# EAGLE board phoney text (EAGLE 9.6.2)
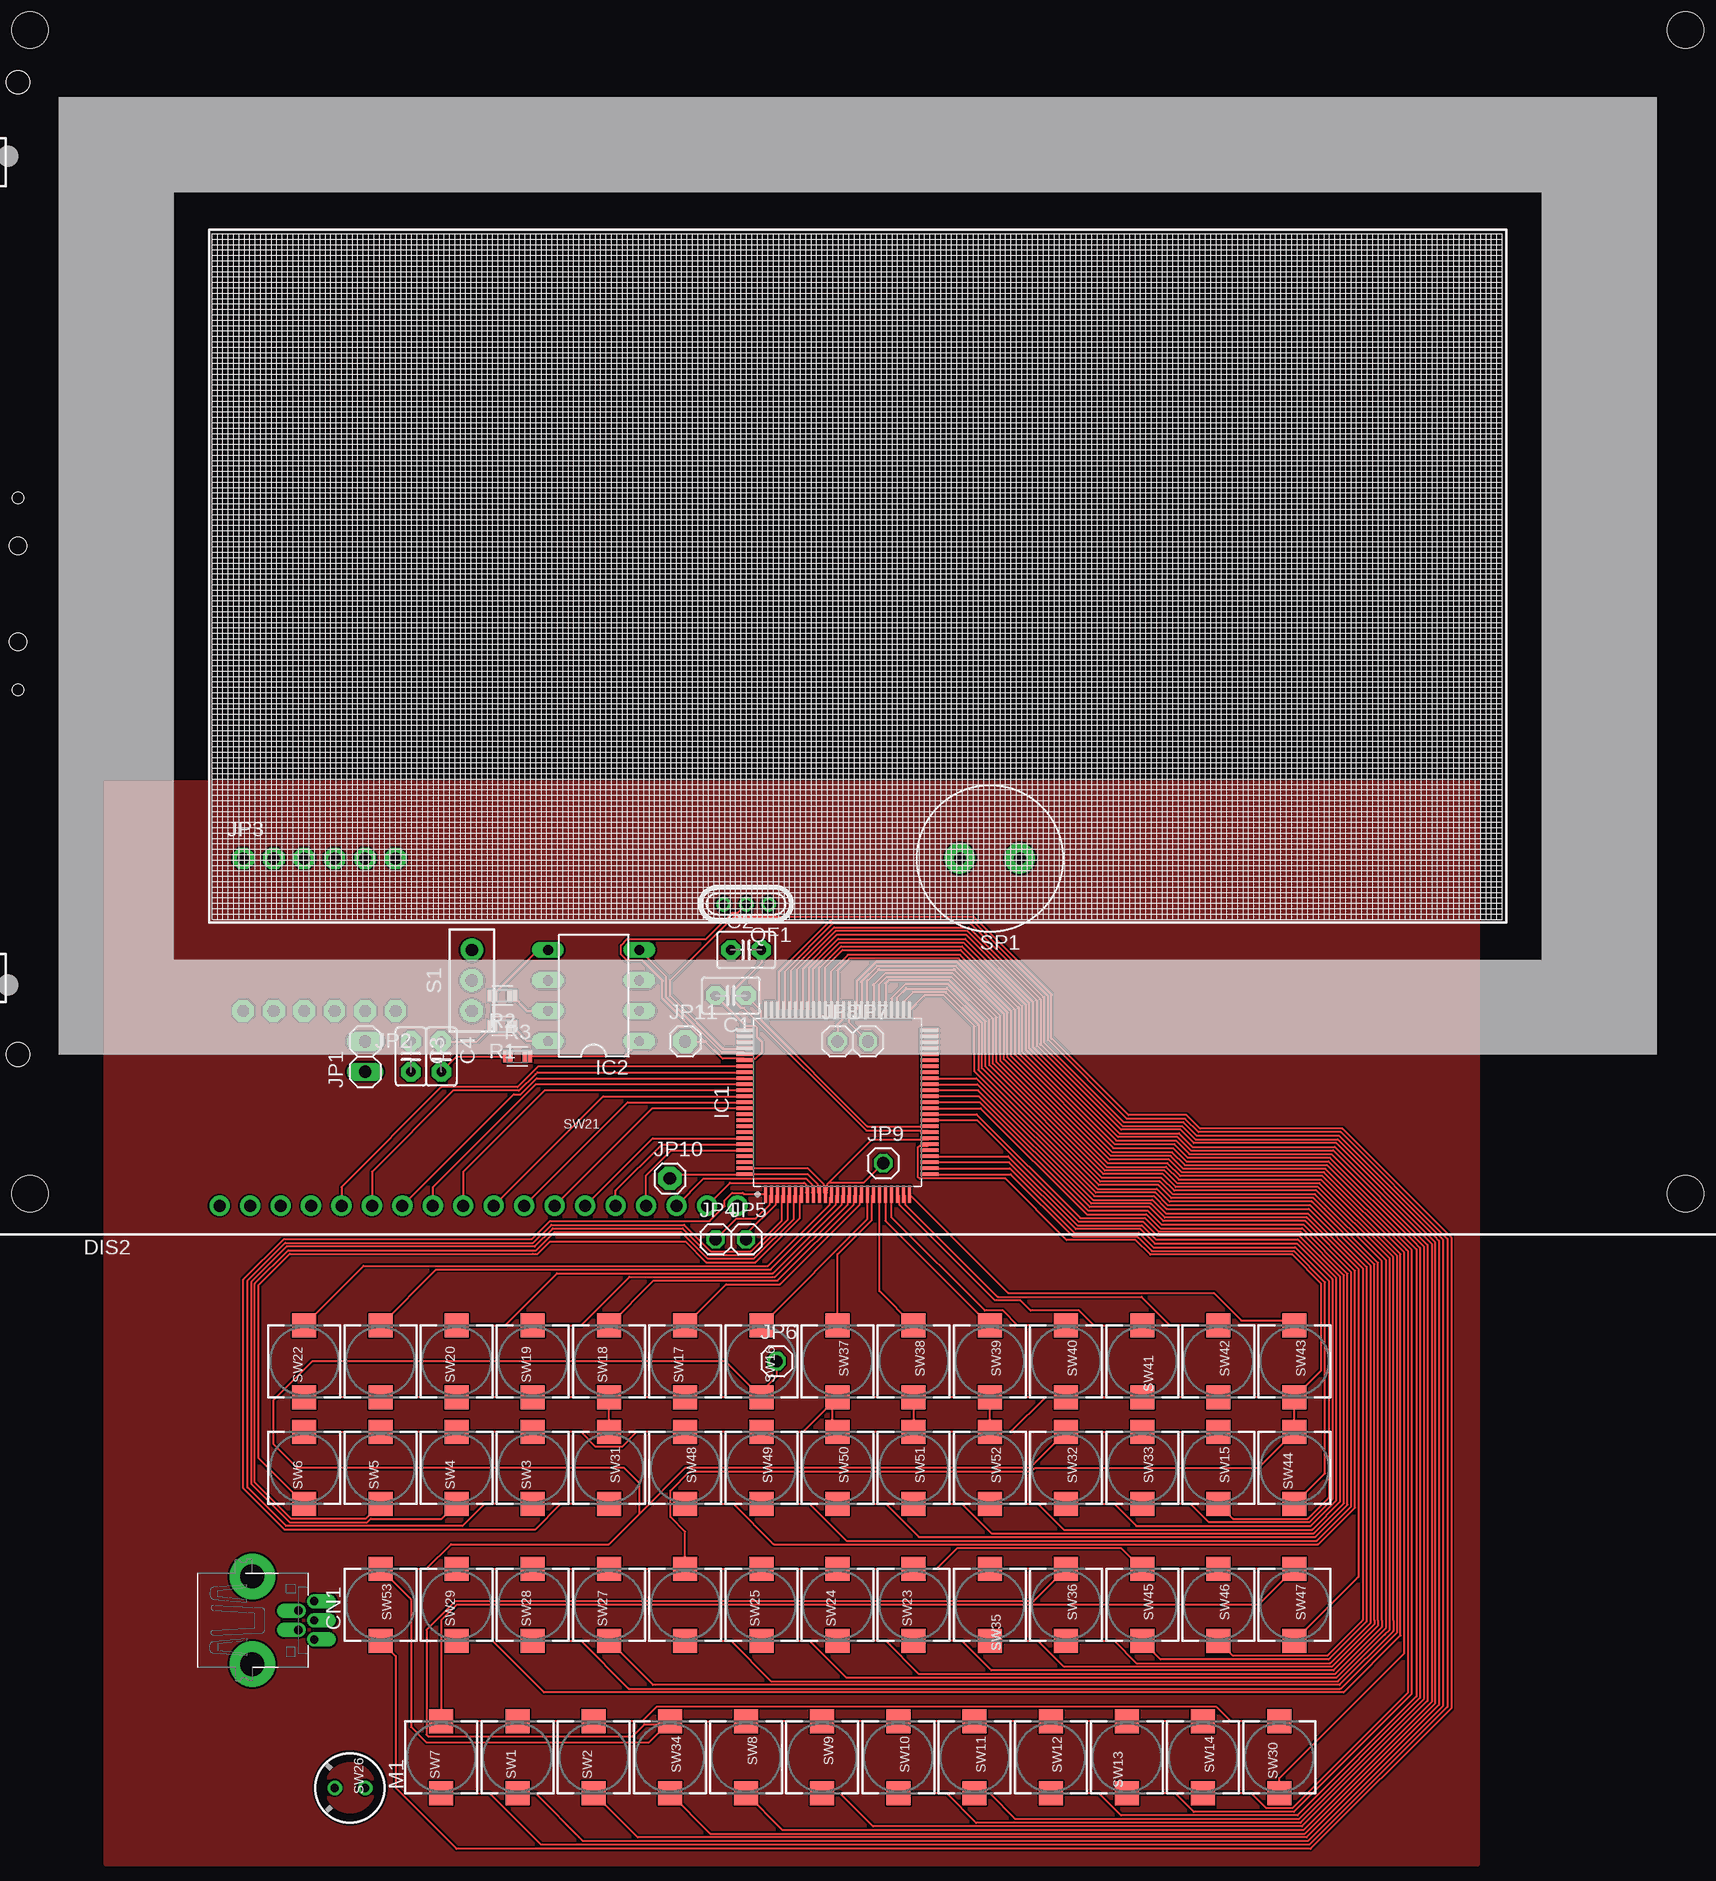
[diagram p0: board, top side]
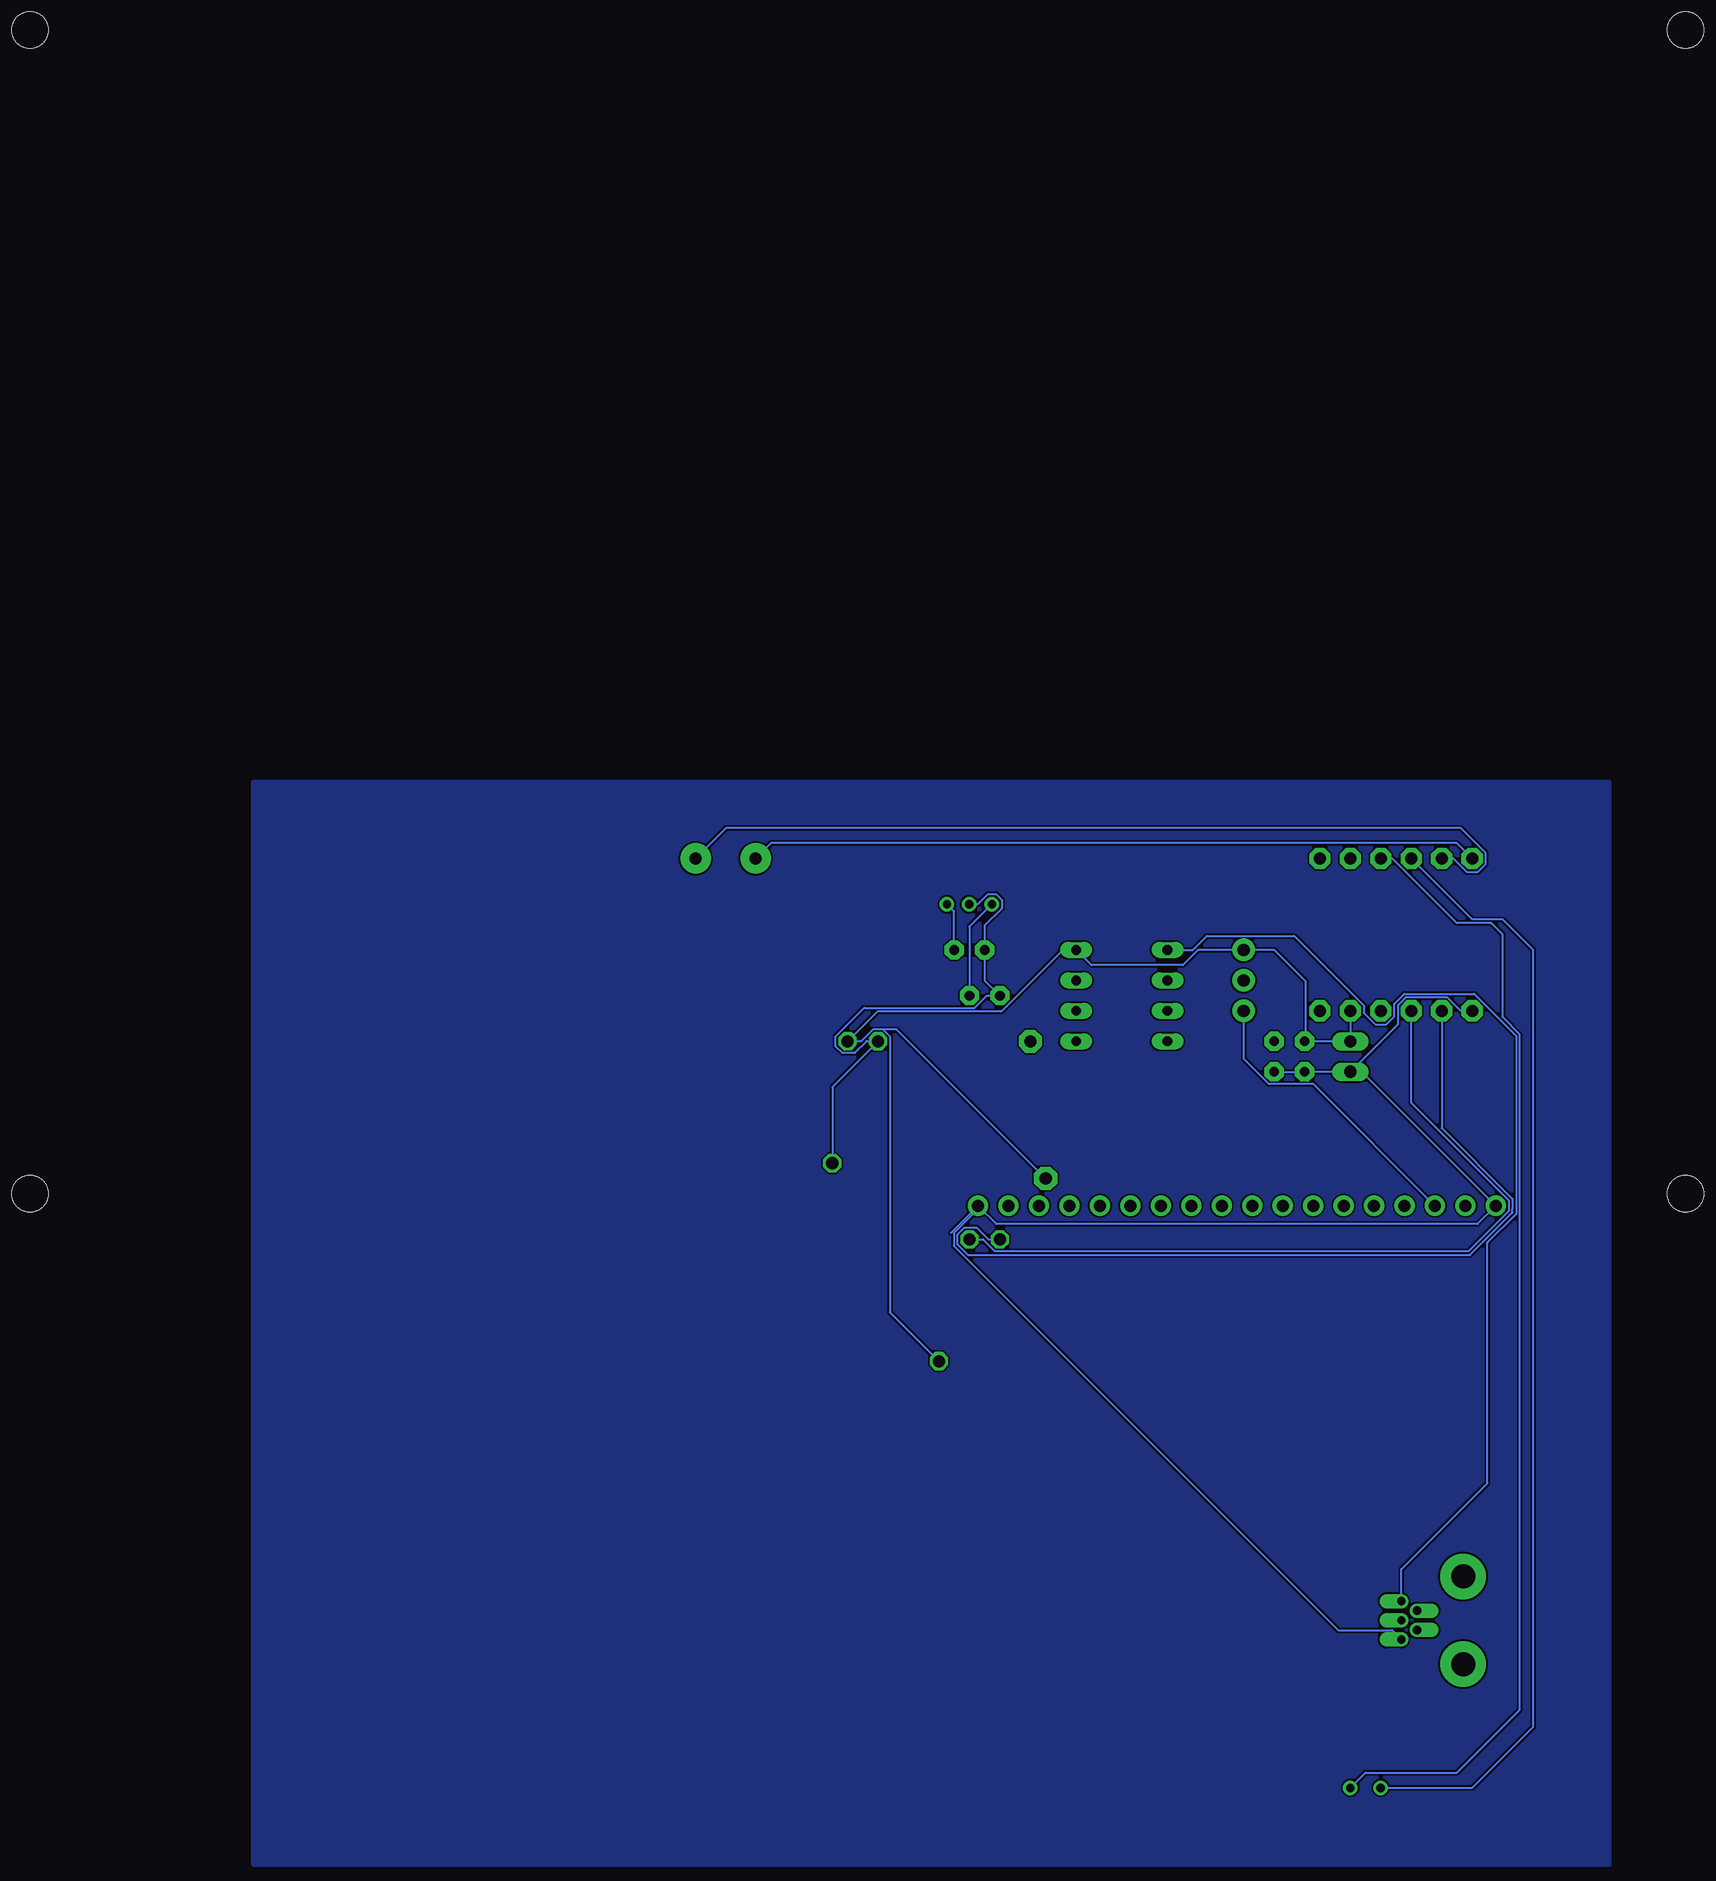
[diagram p1: board, bottom side, seen from below]

No outline drawn. Coordinates in mm, seen from the top.
Copper layers (1*16): Top 0.035mm / dielectric 1.5mm / Bottom 0.035mm
Design rules "default": minimum track width 6mil, minimum drill 0.35mm, track to track 6mil, track to pad 6mil, pad to pad 6mil, via to via 6mil, smd to smd 6mil, copper to edge 40mil, drill to drill 6mil, minimum pad ring 10mil, minimum via ring 8mil, stop-mask expansion 4mil, vias tented up to drill 0mil, thermal gap 10mil

## Footprints (pad centres in the part's own frame; a part is rotated, then mirrored left to right if it is on the bottom)
C2.5-3 = drill 0.813 pad 1.6 octagon: 1 -1.27,0; 2 1.27,0
C2.5-2 = drill 0.813 pad 1.6 octagon: 1 -1.27,0; 2 1.27,0
USB-MINIB-THM-MOLEX = drill 0.7 offset: D+ 0,9.72; D- -0.8,8.42; GND 1.6,9.72; ID 0.8,8.42; VBUS -1.6,9.72 | drill 2 pad 3.81: GND1 -3.65,4.57; GND4 3.65,4.57
MGLS2401280TZ = drill 1 pad 1.676: 1 15.8,-1; 2 18.34,-1; 3 20.88,-1; 4 23.42,-1; 5 25.96,-1; 6 28.5,-1; 7 31.04,-1; 8 33.58,-1; 9 36.12,-1; 10 38.66,-1; 11 41.2,-1; 12 43.74,-1; 13 46.28,-1; 14 48.82,-1; 15 51.36,-1; 16 53.9,-1; 17 56.44,-1; 18 58.98,-1 | hole 3: 0,0; 138,0; 0,97; 138,97
QFP50P1600X1600X160-100N = smd 1.469 x 0.28: 1 -7.671,6; 2 -7.671,5.5; 3 -7.671,5; 4 -7.671,4.5; 5 -7.671,4; 6 -7.671,3.5; 7 -7.671,3; 8 -7.671,2.5; 9 -7.671,2; 10 -7.671,1.5; 11 -7.671,1; 12 -7.671,0.5; 13 -7.671,0; 14 -7.671,-0.5; 15 -7.671,-1; 16 -7.671,-1.5; 17 -7.671,-2; 18 -7.671,-2.5; 19 -7.671,-3; 20 -7.671,-3.5; 21 -7.671,-4; 22 -7.671,-4.5; 23 -7.671,-5; 24 -7.671,-5.5; 25 -7.671,-6; 51 7.671,-6; 52 7.671,-5.5; 53 7.671,-5; 54 7.671,-4.5; 55 7.671,-4; 56 7.671,-3.5; 57 7.671,-3; 58 7.671,-2.5; 59 7.671,-2; 60 7.671,-1.5; 61 7.671,-1; 62 7.671,-0.5; 63 7.671,0; 64 7.671,0.5; 65 7.671,1; 66 7.671,1.5; 67 7.671,2; 68 7.671,2.5; 69 7.671,3; 70 7.671,3.5; 71 7.671,4; 72 7.671,4.5; 73 7.671,5; 74 7.671,5.5; 75 7.671,6 | smd 0.28 x 1.469: 26 -6,-7.671; 27 -5.5,-7.671; 28 -5,-7.671; 29 -4.5,-7.671; 30 -4,-7.671; 31 -3.5,-7.671; 32 -3,-7.671; 33 -2.5,-7.671; 34 -2,-7.671; 35 -1.5,-7.671; 36 -1,-7.671; 37 -0.5,-7.671; 38 0,-7.671; 39 0.5,-7.671; 40 1,-7.671; 41 1.5,-7.671; 42 2,-7.671; 43 2.5,-7.671; 44 3,-7.671; 45 3.5,-7.671; 46 4,-7.671; 47 4.5,-7.671; 48 5,-7.671; 49 5.5,-7.671; 50 6,-7.671; 76 6,7.671; 77 5.5,7.671; 78 5,7.671; 79 4.5,7.671; 80 4,7.671; 81 3.5,7.671; 82 3,7.671; 83 2.5,7.671; 84 2,7.671; 85 1.5,7.671; 86 1,7.671; 87 0.5,7.671; 88 0,7.671; 89 -0.5,7.671; 90 -1,7.671; 91 -1.5,7.671; 92 -2,7.671; 93 -2.5,7.671; 94 -3,7.671; 95 -3.5,7.671; 96 -4,7.671; 97 -4.5,7.671; 98 -5,7.671; 99 -5.5,7.671; 100 -6,7.671
DIL08 = drill 0.813 long: 1 -3.81,-3.81; 2 -1.27,-3.81; 3 1.27,-3.81; 4 3.81,-3.81; 5 3.81,3.81; 6 1.27,3.81; 7 -1.27,3.81; 8 -3.81,3.81
1X02 = drill 1.016 long: 1 -1.27,0; 2 1.27,0
1X06-CLEANBIG = drill 1.016 pad 1.778 octagon: 1 -6.35,0; 2 -3.81,0; 3 -1.27,0; 4 1.27,0; 5 3.81,0; 6 6.35,0
1X01 = drill 1.016 octagon: 1 0,0
1X01' = drill 1.016 pad 1.93 octagon: 1 0,0
F6050AP = drill 0.7 pad 1.2: 1 0,1.27; 2 0,-1.27
UM1 = drill 0.7 pad 1.2: 1 -1.875,0; 2 -0.027,0; 3 1.875,0
RESC1608X60 = smd 0.799 x 0.974: 1 -0.815,0; 2 0.815,0
SWITCH-SPDT-PTH-8.5X3.7MM = drill 1.016 pad 1.88: 1 -2.54,0; 2 0,0; 3 2.54,0
PS12 = drill 1 pad 2.54: P$1 -2.5,0; P$2 2.5,0
PUSHBUTTON_SMD_SJ = smd 2 x 2: P$1 3,0; P$2 -3,0

## Placement (x,y rotation side)
C1  [C2.5-3]  44.45,74.93 180 top
C2  [C2.5-3]  45.72,78.74 0 top
C3  [C2.5-2]  17.78,69.85 270 top
C4  [C2.5-2]  20.32,69.85 270 top
CN1  [USB-MINIB-THM-MOLEX]  0,22.86 270 top
DIS2  MGLS2401280TZ  [MGLS2401280TZ]  -13.97,58.42 0 top
IC1  ATMEGA2560  [QFP50P1600X1600X160-100N]  53.34,66.04 90 top
IC2  [DIL08]  33.02,74.93 90 top
JP1  [1X02]  13.97,69.85 90 top
JP2  [1X06-CLEANBIG]  10.16,73.66 180 top
JP3  [1X06-CLEANBIG]  10.16,86.36 0 top
JP4  [1X01]  43.18,54.61 0 top
JP5  [1X01]  45.72,54.61 0 top
JP6  [1X01]  48.26,44.45 0 top
JP7  [1X01]  55.88,71.12 0 top
JP8  [1X01]  53.34,71.12 0 top
JP9  [1X01]  57.15,60.96 0 top
JP10  [1X01']  39.37,59.69 0 top
JP11  [1X01']  40.64,71.12 0 top
M1  ELECTRET_MICROPHON-F6050AP  [F6050AP]  12.7,8.89 270 top
QF1  16M20AUM1  [UM1]  45.72,82.55 180 top
R1  [RESC1608X60]  25.4,72.39 180 top
R2  [RESC1608X60]  25.4,74.93 180 top
R3  [RESC1608X60]  26.67,69.85 0 top
S1  TOGGLE  [SWITCH-SPDT-PTH-8.5X3.7MM]  22.86,76.2 90 top
SP1  SPEAKER/PS12  [PS12]  66.04,86.36 180 top
SW1  [PUSHBUTTON_SMD_SJ]  26.67,11.43 90 top
SW2  [PUSHBUTTON_SMD_SJ]  33.02,11.43 90 top
SW3  [PUSHBUTTON_SMD_SJ]  27.94,35.56 90 top
SW4  [PUSHBUTTON_SMD_SJ]  21.59,35.56 90 top
SW5  [PUSHBUTTON_SMD_SJ]  15.24,35.56 90 top
SW6  [PUSHBUTTON_SMD_SJ]  8.89,35.56 90 top
SW7  [PUSHBUTTON_SMD_SJ]  20.32,11.43 90 top
SW8  [PUSHBUTTON_SMD_SJ]  45.72,11.43 270 top
SW9  [PUSHBUTTON_SMD_SJ]  52.07,11.43 270 top
SW10  [PUSHBUTTON_SMD_SJ]  58.42,11.43 270 top
SW11  [PUSHBUTTON_SMD_SJ]  64.77,11.43 270 top
SW12  [PUSHBUTTON_SMD_SJ]  71.12,11.43 270 top
SW13  [PUSHBUTTON_SMD_SJ]  77.47,11.43 270 top
SW14  [PUSHBUTTON_SMD_SJ]  83.82,11.43 270 top
SW15  [PUSHBUTTON_SMD_SJ]  85.09,35.56 270 top
SW16  [PUSHBUTTON_SMD_SJ]  46.99,44.45 90 top
SW17  [PUSHBUTTON_SMD_SJ]  40.64,44.45 90 top
SW18  [PUSHBUTTON_SMD_SJ]  34.29,44.45 90 top
SW19  [PUSHBUTTON_SMD_SJ]  27.94,44.45 90 top
SW20  [PUSHBUTTON_SMD_SJ]  21.59,44.45 90 top
SW21  [PUSHBUTTON_SMD_SJ]  15.24,44.45 90 top
SW22  [PUSHBUTTON_SMD_SJ]  8.89,44.45 90 top
SW23  [PUSHBUTTON_SMD_SJ]  59.69,24.13 90 top
SW24  [PUSHBUTTON_SMD_SJ]  53.34,24.13 90 top
SW25  [PUSHBUTTON_SMD_SJ]  46.99,24.13 90 top
SW26  [PUSHBUTTON_SMD_SJ]  40.64,24.13 90 top
SW27  [PUSHBUTTON_SMD_SJ]  34.29,24.13 90 top
SW28  [PUSHBUTTON_SMD_SJ]  27.94,24.13 90 top
SW29  [PUSHBUTTON_SMD_SJ]  21.59,24.13 90 top
SW30  [PUSHBUTTON_SMD_SJ]  90.17,11.43 90 top
SW31  [PUSHBUTTON_SMD_SJ]  34.29,35.56 270 top
SW32  [PUSHBUTTON_SMD_SJ]  72.39,35.56 270 top
SW33  [PUSHBUTTON_SMD_SJ]  78.74,35.56 270 top
SW34  [PUSHBUTTON_SMD_SJ]  39.37,11.43 270 top
SW35  [PUSHBUTTON_SMD_SJ]  66.04,24.13 270 top
SW36  [PUSHBUTTON_SMD_SJ]  72.39,24.13 270 top
SW37  [PUSHBUTTON_SMD_SJ]  53.34,44.45 270 top
SW38  [PUSHBUTTON_SMD_SJ]  59.69,44.45 270 top
SW39  [PUSHBUTTON_SMD_SJ]  66.04,44.45 270 top
SW40  [PUSHBUTTON_SMD_SJ]  72.39,44.45 270 top
SW41  [PUSHBUTTON_SMD_SJ]  78.74,44.45 270 top
SW42  [PUSHBUTTON_SMD_SJ]  85.09,44.45 270 top
SW43  [PUSHBUTTON_SMD_SJ]  91.44,44.45 270 top
SW44  [PUSHBUTTON_SMD_SJ]  91.44,35.56 90 top
SW45  [PUSHBUTTON_SMD_SJ]  78.74,24.13 270 top
SW46  [PUSHBUTTON_SMD_SJ]  85.09,24.13 270 top
SW47  [PUSHBUTTON_SMD_SJ]  91.44,24.13 270 top
SW48  [PUSHBUTTON_SMD_SJ]  40.64,35.56 270 top
SW49  [PUSHBUTTON_SMD_SJ]  46.99,35.56 270 top
SW50  [PUSHBUTTON_SMD_SJ]  53.34,35.56 270 top
SW51  [PUSHBUTTON_SMD_SJ]  59.69,35.56 270 top
SW52  [PUSHBUTTON_SMD_SJ]  66.04,35.56 270 top
SW53  [PUSHBUTTON_SMD_SJ]  15.24,24.13 270 top

## Library data of the parts
C1-C4 = capacitor-wima
CN1 JP2 JP3 JP10 JP11 SP1 SW1-SW53 = adafruit
DIS2 = display-lcd; OC_FARNELL: 1183196; OC_NEWARK: unknown
IC1 = IC_Embedded; CATEGORY: IC_Embedded; DESCRIPTION: IC MCU 8BIT 256KB FLASH 100TQFP; MANUFACTURER: Microchip Technology; MPN: ATMEGA2560-16AUR; OPERATING_TEMP: -40°C to 85°C; PART_STATUS: Active; SERIES: AVR® ATmega; SPEED: 16MHz; SUB-CATEGORY: Microcontroller
IC2 = ic-package
JP1 JP4-JP9 = pinhead
M1 = microphon
QF1 = crystal; OC_FARNELL: unknown; OC_NEWARK: unknown
R1-R3 = Resistor; CATEGORY: Resistor; SUB-CATEGORY: Fixed
S1 = Tinkercad

## Nets
N$1: IC1.2 JP2.5 JP4.1
N$2: IC1.3 JP2.4 JP5.1
N$5: C3.1 IC1.10 IC1.61 IC1.80 IC1.100 IC2.4 JP1.2 JP2.2 JP6.1 JP7.1 JP10.1 S1.3 SW8.P$2 SW9.P$2 SW10.P$2 SW11.P$2 SW12.P$2 SW13.P$2 SW14.P$2 SW15.P$2 SW16.P$2 SW17.P$2 SW18.P$2 SW19.P$2 SW20.P$2 SW21.P$2 SW22.P$2 SW31.P$2 SW32.P$2 SW33.P$2 SW34.P$2 SW35.P$2 SW36.P$2 SW53.P$2
N$6: DIS2.17 IC1.8
N$7: DIS2.12 IC1.89
N$8: DIS2.11 IC1.88
N$9: DIS2.10 IC1.87
N$11: DIS2.9 IC1.86
N$12: DIS2.8 IC1.85
N$13: DIS2.7 IC1.84
N$14: DIS2.6 IC1.83
N$15: DIS2.5 IC1.82
N$16: IC1.73 SW7.P$2
N$17: IC1.72 SW1.P$2
N$18: IC1.71 SW2.P$2
N$19: IC1.19 SW37.P$2
N$20: IC1.20 SW38.P$2
N$21: IC1.21 SW39.P$2
N$22: IC1.22 SW40.P$2
N$23: IC1.23 SW41.P$2
N$24: IC1.24 SW42.P$2
N$25: IC1.25 SW43.P$2
N$26: IC1.26 SW44.P$2
N$27: IC1.53 SW23.P$2
N$28: IC1.54 SW24.P$2
N$29: IC1.55 SW25.P$2
N$30: IC1.56 SW26.P$2
N$31: IC1.57 SW27.P$2
N$32: IC1.58 SW28.P$2
N$33: IC1.59 SW29.P$2
N$34: IC1.60 SW30.P$2
N$35: IC1.69 SW8.P$1
N$36: IC1.68 SW9.P$1
N$37: IC1.67 SW10.P$1
N$38: IC1.66 SW11.P$1
N$39: IC1.65 SW12.P$1
N$40: IC1.64 SW13.P$1
N$41: IC1.63 SW14.P$1
N$42: IC1.27 SW15.P$1
N$43: IC1.18 SW16.P$1
N$44: IC1.17 SW17.P$1
N$45: IC1.16 SW18.P$1
N$46: IC1.15 SW19.P$1
N$47: IC1.14 SW20.P$1
N$48: IC1.13 SW21.P$1
N$49: IC1.12 SW22.P$1
N$50: IC1.1 SW31.P$1
N$51: IC1.29 SW32.P$1
N$52: IC1.28 SW33.P$1
N$53: IC1.70 SW34.P$1
N$54: IC1.52 SW35.P$1
N$55: IC1.51 SW36.P$1
N$56: IC1.42 SW45.P$1
N$57: IC1.41 SW46.P$1
N$58: IC1.40 SW47.P$1
N$59: IC1.39 SW48.P$1
N$60: IC1.38 SW49.P$1
N$61: IC1.37 SW50.P$1
N$62: IC1.36 SW51.P$1
N$63: IC1.35 SW52.P$1
N$64: IC1.4 SW3.P$2
N$65: IC1.5 SW4.P$2
N$66: IC1.6 SW5.P$2
N$67: IC1.7 SW6.P$2
N$69: IC1.31 SW1.P$1 SW2.P$1 SW3.P$1 SW4.P$1 SW5.P$1 SW6.P$1 SW7.P$1 SW23.P$1 SW24.P$1 SW25.P$1 SW26.P$1 SW27.P$1 SW28.P$1 SW29.P$1 SW30.P$1 SW37.P$1 SW38.P$1 SW39.P$1 SW40.P$1 SW41.P$1 SW42.P$1 SW43.P$1 SW44.P$1 SW45.P$2 SW46.P$2 SW47.P$2 SW48.P$2 SW49.P$2 SW50.P$2 SW51.P$2 SW52.P$2
N$72: IC1.79 SW53.P$1
N$73: DIS2.3 S1.1
N$74: C1.2 C2.1 IC1.11 IC1.32 IC1.62 IC1.81 IC1.99 JP8.1 JP9.1 JP11.1 QF1.2
N$75: C1.1 IC1.34 QF1.3
N$76: C2.2 IC1.33 QF1.1
N$78: IC2.1 R3.2
N$79: IC2.8 R1.1
N$80: IC2.7 R2.1
N$81: C4.1 CN1.VBUS IC2.5 R1.2 R2.2
N$83: DIS2.13 IC1.94
N$84: DIS2.14 IC1.95
N$85: C3.2 C4.2 CN1.GND DIS2.1 DIS2.18 JP1.1 JP2.6 R3.1
N$86: JP3.1 SP1.P$2
N$87: JP3.2 SP1.P$1
N$88: JP3.3 M1.2
N$89: JP3.4 M1.1
N$90: DIS2.15 IC1.96
N$91: DIS2.16 IC1.9

## Tracks (layer width: path | path; a pad name or v marks a point on that pad's centre or on a via)
1
  pour Top: -6.35,92.71 106.68,92.71 106.68,2.54 -7.62,2.54 -7.62,92.71
N$1
  Top 0.152: JP4.1 44.92,56.35 46.52,56.35 47.71,57.54 47.71,58.24 IC1.2
  Bottom 0.152: JP2.5 6.35,63.88 0.46,57.99 0.46,57.15 0.46,56.85 4,53.31 45.83,53.31 46.71,54.2 46.71,55.02 46.13,55.6 45.14,55.6 44.15,54.61 JP4.1
N$2
  Top 0.152: IC1.3 48.21,58.24 48.21,57.54 45.72,55.05 JP5.1
  Bottom 0.152: JP5.1 44.58,54.61 43.59,53.62 4.12,53.62 0.76,56.98 0.76,57.86 8.89,65.99 JP2.4
N$5
  Top 0.152: SW22.P$2 SW21.P$2 SW20.P$2 SW19.P$2 SW18.P$2 | SW18.P$2 SW17.P$2 SW16.P$2 46.76,41.68 | SW31.P$2 SW18.P$2 | SW35.P$2 SW36.P$2 69.69,24.43 21.46,24.43 19.09,22.06 19.09,13.34 19.23,13.2 36.25,13.2 37.25,14.2 39.14,14.2 | SW14.P$2 SW13.P$2 SW12.P$2 SW11.P$2 SW10.P$2 SW9.P$2 SW8.P$2 SW34.P$2 39.14,14.2 | 36.83,31.75 34.29,29.21 21.13,29.21 19.05,27.13 SW53.P$2 17.78,24.59 17.78,13.97 19.05,12.7 37.64,12.7 39.14,14.2 | 36.83,31.75 36.83,34.29 35.56,35.56 8.3,35.56 6.35,37.51 6.35,41.23 9.57,44.45 43.99,44.45 46.76,41.68 | 36.83,31.75 40.64,35.56 69.39,35.56 SW32.P$2 SW33.P$2 SW15.P$2 | IC2.4 39.06,76.5 39.06,74.8 43.7,70.17 45.54,70.17 IC1.80 | IC1.10 51.71,58.5 51.71,59.2 50.87,60.04 IC1.100 39.72,60.04 JP10.1 | JP7.1 54.34,72.66 IC1.61 | JP6.1 48.26,43.18 46.76,41.68
  Bottom 0.152: 52.93,72.11 52.35,71.53 52.35,48.54 JP6.1 | 52.93,72.11 53.75,72.11 54.74,71.12 JP7.1 53.4,73.6 43.06,73.6 37.91,78.74 IC2.4 35.56,77.47 27.94,77.47 26.67,78.74 S1.3 20.32,78.74 17.68,76.1 17.68,71.22 C3.1 JP1.2 JP2.2 | 52.93,72.11 51.79,72.11 JP10.1
N$6
  Top 0.152: IC1.8 50.71,58.5 50.71,59.2 50.58,59.33 44.38,59.33 DIS2.17
N$7
  Top 0.152: IC1.89 37.89,65.54 DIS2.12
N$8
  Top 0.152: DIS2.11 35.85,66.04 IC1.88
N$9
  Top 0.152: DIS2.10 33.81,66.54 IC1.87
N$11
  Top 0.152: IC1.86 28.94,67.04 22.15,60.25 DIS2.9
N$12
  Top 0.152: IC1.85 28.19,67.54 19.61,58.96 DIS2.8
N$13
  Top 0.152: DIS2.7 26.35,66.7 26.92,66.7 28.26,68.04 IC1.84
N$14
  Top 0.152: DIS2.6 14.53,60.25 21.29,67 26.8,67 28.16,68.36 28.33,68.54 IC1.83
N$15
  Top 0.152: IC1.82 28.4,69.04 26.67,67.31 20.32,67.31 11.99,58.98 DIS2.5
N$16
  Top 0.152: SW7.P$2 21.59,8.43 21.81,8.43 24.35,8.43 28.62,4.15 92.69,4.15 104.18,15.65 104.18,54.65 95.29,63.55 83.43,63.55 82.31,64.67 77.47,64.67 70.87,71.27 70.87,74.92 64.55,81.23 52.81,81.23 48.47,76.89 48.47,73.84 IC1.73
N$17
  Top 0.152: SW1.P$2 28.16,8.43 32.13,4.46 92.57,4.46 103.78,15.68 103.78,54.62 103.33,55.07 95.16,63.25 83.3,63.25 82.19,64.36 77.22,64.36 70.56,71.03 70.56,74.79 64.43,80.92 52.94,80.92 48.97,76.96 48.97,73.84 IC1.72
N$18
  Top 0.152: IC1.71 49.47,73.84 49.47,77.03 53.06,80.62 64.3,80.62 70.26,74.66 70.26,70.9 77.1,64.06 82.06,64.06 83.18,62.94 95.03,62.94 103.12,54.86 103.48,54.5 103.48,15.8 92.44,4.76 36.69,4.76 SW2.P$2
N$19
  Top 0.152: SW37.P$2 53.34,53.37 56.21,56.24 56.21,58.24 IC1.19
N$20
  Top 0.152: SW38.P$2 56.84,50.3 IC1.20
N$21
  Top 0.152: IC1.21 57.34,56.15 SW39.P$2
N$22
  Top 0.152: SW40.P$2 68.36,47.45 67.14,48.68 65.62,48.68 57.84,56.46 IC1.22
N$23
  Top 0.152: SW41.P$2 74.71,47.45 73.48,48.68 69.43,48.68 68.58,49.53 66.48,49.53 58.47,57.54 58.47,58.24 IC1.23
N$24
  Top 0.152: IC1.24 58.97,58.24 58.97,57.54 66.68,49.84 78.68,49.84 81.06,47.45 SW42.P$2
N$25
  Top 0.152: SW43.P$2 91.03,47.85 87.01,47.85 84.72,50.14 67.57,50.14 IC1.25
N$26
  Top 0.152: SW44.P$2 93.98,35.1 93.98,51.04 91.38,53.65 79.54,53.65 78.66,54.53 78.32,54.86 72.95,54.86 67.78,60.04 IC1.26
N$27
  Top 0.152: SW23.P$2 63.72,21.13 66.17,18.68 94.68,18.68 98.4,22.41 98.4,22.86 98.4,52.66 93.93,57.13 93.93,57.15 93.91,57.15 92.99,58.06 81.16,58.06 80.09,59.13 75.13,59.13 65.38,68.88 65.38,72.64 62.48,75.54 59.08,75.54 58.34,74.8 IC1.53
N$28
  Top 0.152: SW24.P$2 57.37,21.13 60.12,18.38 94.8,18.38 98.7,22.28 98.7,22.86 98.7,52.81 93.14,58.37 81.28,58.37 80.22,59.44 75.25,59.44 65.68,69 65.68,72.77 62.61,75.84 58.95,75.84 57.84,74.73 IC1.54
N$29
  Top 0.152: SW25.P$2 50.8,21.13 51.02,21.13 54.07,18.07 94.93,18.07 99.06,22.2 99.06,52.88 93.27,58.67 81.41,58.67 80.34,59.74 75.38,59.74 65.99,69.13 65.99,72.89 62.68,76.2 57.58,76.2 57.34,75.96 IC1.55
N$30
  Top 0.152: SW26.P$2 44.45,21.13 47.81,17.77 95.06,17.77 98.97,21.68 99.36,22.08 99.36,53.01 93.39,58.98 81.53,58.98 80.47,60.05 75.51,60.05 66.29,69.26 66.29,73.02 62.81,76.5 57.45,76.5 56.84,75.89 IC1.56
N$31
  Top 0.152: IC1.57 56.34,75.82 57.33,76.81 62.94,76.81 66.6,73.15 66.6,69.38 75.63,60.35 80.59,60.35 81.66,59.28 93.52,59.28 99.67,53.13 99.67,22.86 99.67,21.95 95.18,17.46 37.96,17.46 SW27.P$2
N$32
  Top 0.152: IC1.58 55.84,76.16 56.79,77.11 63.06,77.11 66.9,73.27 66.9,69.51 75.76,60.66 80.72,60.66 81.79,59.59 93.65,59.59 99.97,53.26 99.97,21.82 95.31,17.16 95.25,17.16 35.94,17.16 31.97,21.13 SW28.P$2
N$33
  Top 0.152: SW29.P$2 24.59,21.13 28.87,16.85 95.54,16.85 100.28,21.59 100.28,53.39 93.77,59.89 81.91,59.89 80.85,60.96 75.89,60.96 67.21,69.64 67.21,73.4 63.19,77.42 56.67,77.42 55.34,76.09 IC1.59
N$34
  Top 0.152: SW30.P$2 90.17,9.7 100.58,20.11 100.58,53.51 93.9,60.2 82.04,60.2 80.97,61.27 76.01,61.27 67.51,69.76 67.51,73.53 63.32,77.72 56.54,77.72 54.97,76.15 54.97,73.84 IC1.60
N$35
  Top 0.152: IC1.69 50.47,73.84 50.47,77.17 53.32,80.01 64.05,80.01 69.65,74.41 69.65,70.65 76.84,63.45 81.81,63.45 82.92,62.33 94.78,62.33 102.69,54.43 102.87,54.24 102.87,16.06 92.19,5.37 48.78,5.37 SW8.P$1
N$36
  Top 0.152: SW9.P$1 53.56,8.43 56.31,5.68 92.06,5.68 102.51,16.13 102.51,54.17 94.66,62.03 82.8,62.03 81.68,63.14 76.72,63.14 69.34,70.52 69.34,74.28 63.97,79.65 53.39,79.65 50.97,77.23 50.97,73.84 IC1.68
N$37
  Top 0.152: IC1.67 51.34,77.17 53.52,79.35 63.84,79.35 69.04,74.16 69.04,70.39 76.59,62.84 81.55,62.84 82.67,61.72 94.53,61.72 102.21,54.04 102.21,16.26 91.93,5.98 64.89,5.98 62.45,8.43 SW10.P$1
N$38
  Top 0.152: SW11.P$1 66.04,8.43 68.18,6.29 91.81,6.29 101.91,16.38 101.91,53.92 101.41,54.41 94.4,61.42 82.55,61.42 81.43,62.53 76.47,62.53 68.73,70.27 68.73,74.03 63.72,79.05 53.65,79.05 51.84,77.24 IC1.66
N$39
  Top 0.152: SW12.P$1 72.39,8.43 72.61,8.43 75.15,8.43 76.98,6.59 91.68,6.59 101.6,16.51 101.6,53.79 94.28,61.11 82.42,61.11 81.3,62.23 76.34,62.23 68.43,70.14 68.43,73.91 63.59,78.74 53.77,78.74 52.29,77.25 52.29,73.77 IC1.65
N$40
  Top 0.152: SW13.P$1 78.74,8.43 78.96,8.43 81.5,8.43 83.03,6.9 91.39,6.9 101.19,16.7 101.19,53.77 94.15,60.81 82.29,60.81 81.22,61.87 76.26,61.87 68.12,70.02 68.12,73.78 63.57,78.33 54.2,78.33 52.84,76.97 IC1.64
N$41
  Top 0.152: IC1.63 53.34,77.04 54.33,78.03 63.44,78.03 67.82,73.65 67.82,69.89 76.14,61.57 81.1,61.57 82.17,60.5 94.03,60.5 100.76,53.77 100.89,53.64 100.89,16.83 91.27,7.2 89.08,7.2 87.85,8.43 SW14.P$1
N$42
  Top 0.152: SW15.P$1 86.32,31.33 92.53,31.33 94.28,33.08 94.28,51.17 91.5,53.95 79.67,53.95 78.45,55.17 73.08,55.17 67.71,60.54 IC1.27
N$43
  Top 0.152: SW16.P$1 55.84,56.3 IC1.18
N$44
  Top 0.152: SW17.P$1 44.07,50.88 48.55,50.88 55.21,57.54 55.21,58.24 IC1.17
N$45
  Top 0.152: SW18.P$1 38.02,51.18 48.35,51.18 54.71,57.54 54.71,58.24 IC1.16
N$46
  Top 0.152: IC1.15 54.21,58.24 54.21,57.54 48.16,51.49 36,51.49 31.97,47.45 SW19.P$1
N$47
  Top 0.152: IC1.14 53.71,58.24 53.71,57.54 47.96,51.79 29.96,51.79 25.62,47.45 SW20.P$1
N$48
  Top 0.152: IC1.13 53.21,58.24 53.21,57.55 47.77,52.09 19.89,52.09 SW21.P$1
N$49
  Top 0.152: IC1.12 52.91,58.3 52.71,58.1 52.71,57.54 47.57,52.4 13.84,52.4 SW22.P$1
N$50
  Top 0.152: SW31.P$1 30.26,32.56 28.12,30.42 7.25,30.42 3.81,33.86 3.81,51.25 7.18,54.62 27.85,54.62 29.16,55.93 29.37,56.13 42.69,56.13 43.94,57.38 43.94,57.86 44.57,58.49 45.45,58.49 45.52,58.42 47.29,58.42 IC1.1
N$51
  Top 0.152: SW32.P$1 76.42,32.56 78.25,30.72 92.79,30.72 94.89,32.83 94.89,51.42 91.71,54.61 79.87,54.61 78.7,55.78 73.33,55.78 67.57,61.54 IC1.29
N$52
  Top 0.152: SW33.P$1 82.77,32.56 84.3,31.03 92.66,31.03 94.59,32.95 94.59,51.3 91.63,54.25 79.79,54.25 78.57,55.47 73.2,55.47 67.64,61.04 IC1.28
N$53
  Top 0.152: IC1.70 49.97,73.84 49.97,77.1 53.19,80.31 64.17,80.31 69.95,74.54 69.95,70.77 76.97,63.75 81.93,63.75 83.05,62.64 94.91,62.64 102.9,54.64 103.17,54.37 103.17,15.93 92.31,5.07 42.73,5.07 SW34.P$1
N$54
  Top 0.152: SW35.P$1 69.85,21.13 70.07,21.13 72.21,18.99 94.55,18.99 98.09,22.53 98.09,22.86 98.09,52.53 92.87,57.76 81.03,57.76 79.96,58.83 75,58.83 65.08,68.75 65.08,72.52 62.36,75.23 59.67,75.23 58.84,74.41 IC1.52
N$55
  Top 0.152: SW36.P$1 76.42,21.13 78.25,19.29 94.42,19.29 97.79,22.66 97.79,52.41 92.74,57.45 80.9,57.45 79.84,58.52 74.88,58.52 64.77,68.63 64.77,72.39 62.23,74.93 60.56,74.93 IC1.51
N$56
  Top 0.152: IC1.42 64.92,68.04 74.75,58.22 79.71,58.22 80.78,57.15 92.61,57.15 97.43,52.33 97.43,22.73 94.3,19.6 80.27,19.6 SW45.P$1
N$57
  Top 0.152: IC1.41 64.99,67.54 74.62,57.91 79.58,57.91 80.75,56.74 92.59,56.74 97.13,52.2 97.13,22.86 94.17,19.9 86.32,19.9 SW46.P$1
N$58
  Top 0.152: IC1.40 65.06,67.04 74.5,57.61 79.46,57.61 80.63,56.44 92.46,56.44 96.77,52.13 96.77,26.46 SW47.P$1
N$59
  Top 0.152: SW48.P$1 44.67,32.56 48.03,29.2 93.42,29.2 96.47,32.25 96.47,52 92.34,56.13 80.5,56.13 79.33,57.3 74.37,57.3 65.13,66.54 IC1.39
N$60
  Top 0.152: SW49.P$1 51.02,32.56 54.07,29.5 93.29,29.5 96.16,32.38 96.16,51.88 92.21,55.83 80.37,55.83 79.2,57 74.24,57 65.2,66.04 IC1.38
N$61
  Top 0.152: SW50.P$1 57.37,32.56 60.12,29.81 93.17,29.81 95.86,32.5 95.86,51.75 92.08,55.52 80.25,55.52 79.08,56.69 74.12,56.69 65.27,65.54 IC1.37
N$62
  Top 0.152: SW51.P$1 63.72,32.56 66.17,30.11 93.04,30.11 95.56,32.63 95.56,51.62 91.96,55.22 80.12,55.22 78.95,56.39 73.58,56.39 64.93,65.04 IC1.36
N$63
  Top 0.152: SW52.P$1 70.07,32.56 72.21,30.42 92.91,30.42 95.25,32.75 95.25,51.5 91.83,54.91 80,54.91 78.83,56.08 73.46,56.08 65,64.54 IC1.35
N$64
  Top 0.152: SW3.P$2 23.91,32.56 22.07,30.72 7.38,30.72 4.17,33.93 4.17,51.18 7.3,54.32 27.98,54.32 29.49,55.83 40.56,55.83 42.77,53.62 46.13,53.62 48.71,56.2 48.71,58.24 IC1.4
N$65
  Top 0.152: SW4.P$2 20.36,31.33 14.44,31.33 14.14,31.03 7.67,31.03 4.47,34.23 4.47,51.05 7.43,54.01 28.11,54.01 29.59,55.5 29.62,55.52 40.43,55.52 42.64,53.31 46.26,53.31 49.21,56.27 49.21,58.24 IC1.5
N$66
  Top 0.152: SW5.P$2 14.01,31.33 7.79,31.33 4.78,34.35 4.78,50.93 7.56,53.71 28.23,53.71 29.17,54.65 29.74,55.22 40.31,55.22 42.52,53.01 46.38,53.01 49.71,56.34 49.71,58.24 IC1.6
N$67
  Top 0.152: SW6.P$2 5.08,36.37 5.08,50.8 7.68,53.4 27.94,53.4 28.36,53.4 29.39,54.43 40.66,54.43 42.39,52.7 46.51,52.7 50.21,56.41 50.21,58.24 IC1.7
N$69
  Top 0.152: 52.94,41.05 SW37.P$1 SW38.P$1 | 52.94,41.05 50.45,38.56 SW49.P$2 | SW50.P$2 52.94,38.97 52.94,41.05 | SW38.P$1 59.69,39.37 | 59.69,39.37 SW51.P$2 SW50.P$2 | SW50.P$2 SW49.P$2 | SW49.P$2 SW48.P$2 36.61,38.56 35.38,37.33 33.2,37.33 31.97,38.56 SW3.P$1 SW4.P$1 SW5.P$1 SW6.P$1 | SW52.P$2 SW39.P$1 | SW39.P$1 SW40.P$1 SW41.P$1 | SW39.P$1 SW38.P$1 | SW52.P$2 67.77,38.56 70.66,41.45 SW41.P$1 | SW43.P$1 SW44.P$1 88.44,35.56 69.82,35.56 69.52,35.26 41.01,35.26 39.41,33.66 39.41,31.46 40.64,30.24 SW26.P$1 | SW43.P$1 SW42.P$1 SW41.P$1 | SW29.P$1 SW28.P$1 SW27.P$1 SW26.P$1 | SW26.P$1 SW25.P$1 SW24.P$1 SW23.P$1 61.58,27.13 63.34,28.89 76.98,28.89 SW45.P$2 SW46.P$2 SW47.P$2 88.44,24.13 21.59,24.13 20.32,22.86 20.32,15.24 | 20.32,15.24 SW7.P$1 | 20.32,15.24 21.13,14.43 SW1.P$1 SW2.P$1 37.05,14.43 38.27,15.66 84.92,15.66 86.14,14.43 SW30.P$1 | SW52.P$2 60.5,38.56 59.69,39.37 | IC1.31 60.88,62.41 60.18,62.41 60.05,62.27 60.05,59.8 60.18,59.67 67.33,59.67 72.44,54.56 78.19,54.56 79.41,53.34 91.25,53.34 93.67,50.92 93.67,43.69 SW43.P$1
N$72
  Top 0.152: SW53.P$1 16.51,19.86 16.51,8.89 21.59,3.81 92.78,3.81 104.49,15.52 104.49,54.78 95.41,63.86 83.56,63.86 82.44,64.97 77.6,64.97 71.17,71.4 71.17,74.93 71.17,75.04 64.68,81.53 44.7,81.53 39.37,76.2 39.37,74.93 43.76,70.54 IC1.79
N$73
  Bottom 0.152: DIS2.3 17.04,67.55 20.75,67.55 22.86,69.67 S1.1
N$74
  Top 0.152: C1.2 45.7,72.41 46.5,72.41 46.63,72.28 46.63,71.48 46.99,71.12 46.99,70.16 46.5,69.67 45.54,69.67 | 52.21,58.5 IC1.11 52.47,58.5 52.47,58.76 | 52.21,58.5 52.21,59.2 50.87,60.54 IC1.99 | 52.47,58.76 52.21,58.5 | 52.6,59.33 56.18,62.91 60.88,62.91 IC1.32 | JP9.1 55.52,59.33 52.6,59.33 | 52.6,59.33 52.47,59.2 52.47,58.76 | 45.54,69.67 IC1.81 | QF1.2 45.04,81.84 44.58,81.84 42.37,79.63 35.8,79.63 35.28,79.11 35.28,78.37 35.8,77.85 37.1,77.85 38.76,76.19 38.76,74.68 42.32,71.12 | 45.54,69.67 43.77,69.67 42.32,71.12 | IC1.62 53.71,73.58 53.71,72.88 53.34,72.51 JP8.1 | JP11.1 42.32,71.12
  Bottom 0.152: QF1.2 45.02,82.55 44.19,83.38 43.5,83.38 43.01,82.89 43.01,82.2 44.45,80.77 C2.1 44.45,76.2 C1.2 44.27,74.93 45.29,73.9 54.5,73.9 56.87,71.53 56.87,70.71 56.29,70.13 55.3,70.13 54.31,71.12 JP8.1 57.15,67.31 JP9.1
N$75
  Top 0.152: C1.1 46.97,73.68 46.97,72.88 55.81,64.04 IC1.34
  Bottom 0.152: QF1.3 45.72,80.67 C1.1
N$76
  Top 0.152: IC1.33 60.88,63.67 55.75,63.67 45.52,73.9 45.29,73.9 44.69,74.5 44.69,75.36 46.99,77.66 C2.2
  Bottom 0.152: C2.2 46.99,81.94 QF1.1
N$78
  Top 0.152: IC2.1 35.56,69.85 R3.2
N$79
  Top 0.152: R1.1 27.48,71.12 IC2.8
N$80
  Top 0.152: IC2.7 27.48,73.66 R2.1
N$81
  Top 0.152: IC2.5 28.39,78.74 R2.2 R1.2 23.32,71.12 C4.1
  Bottom 0.152: IC2.5 27.1,78.74 25.93,79.91 18.64,79.91 12.85,74.12 12.85,73.5 11.89,72.54 10.97,72.54 10.31,73.2 10.31,74.25 9.48,75.08 3.65,75.08 0.15,71.58 0.15,56.73 2.54,54.34 2.54,34.29 9.72,27.11 CN1.VBUS
N$83
  Top 0.152: DIS2.13 37.93,63.04 IC1.94
N$84
  Top 0.152: DIS2.14 34.85,58.69 38.7,62.54 IC1.95
N$85
  Top 0.152: C4.2 21.59,69.85 R3.1
  Bottom 0.152: C4.2 C3.2 JP1.1 | JP1.1 12.99,68.58 DIS2.1 3.37,55.88 43.47,55.88 DIS2.18 | JP1.1 10.01,72.54 10.01,74.12 9.35,74.78 5.89,74.78 4.77,73.66 JP2.6 | DIS2.18 47.27,55.16 | CN1.GND 10.49,22.03 14.97,22.03 47.02,54.07 47.02,55.15 45.01,57.15 DIS2.18
N$86
  Bottom 0.152: JP3.1 5.08,87.63 62.27,87.63 SP1.P$2
N$87
  Bottom 0.152: JP3.2 5.39,86.36 4.27,85.24 3.35,85.24 2.69,85.9 2.69,86.82 4.77,88.9 66,88.9 SP1.P$1
N$88
  Bottom 0.152: M1.2 3.81,8.89 -1.27,13.97 -1.27,78.74 1.27,81.28 3.81,81.28 JP3.3
N$89
  Bottom 0.152: M1.1 12.7,10.16 5.08,10.16 -0.15,15.39 -0.15,71.71 1.27,73.13 1.27,80.01 2.23,80.97 5.09,80.97 10.47,86.36 JP3.4
N$90
  Top 0.152: DIS2.15 37.39,59.96 39.47,62.04 IC1.96
N$91
  Top 0.152: IC1.9 51.21,58.5 51.21,59.2 50.72,59.69 46.99,59.69 46.52,59.69 46.5,59.67 42.18,59.67 DIS2.16
Q
  pour Bottom: -7.62,92.71 105.41,92.71 105.41,7.62 105.41,2.54 5.08,2.54 -7.62,2.54